# Altium PCB Morpheus_bottom_flex.PcbDoc
Units mm, origin at the board's own origin, x right, y up, seen from the top; angles counter-clockwise.
Board outline 38.7 x 17 mm, 4 copper layers (Top Layer, GND, PWR, Bottom Layer), stack 0.778 mm thick; 45 components, 37 nets, 254 pads, 85 vias.
Unrouted connection lines stored in the file: 76.
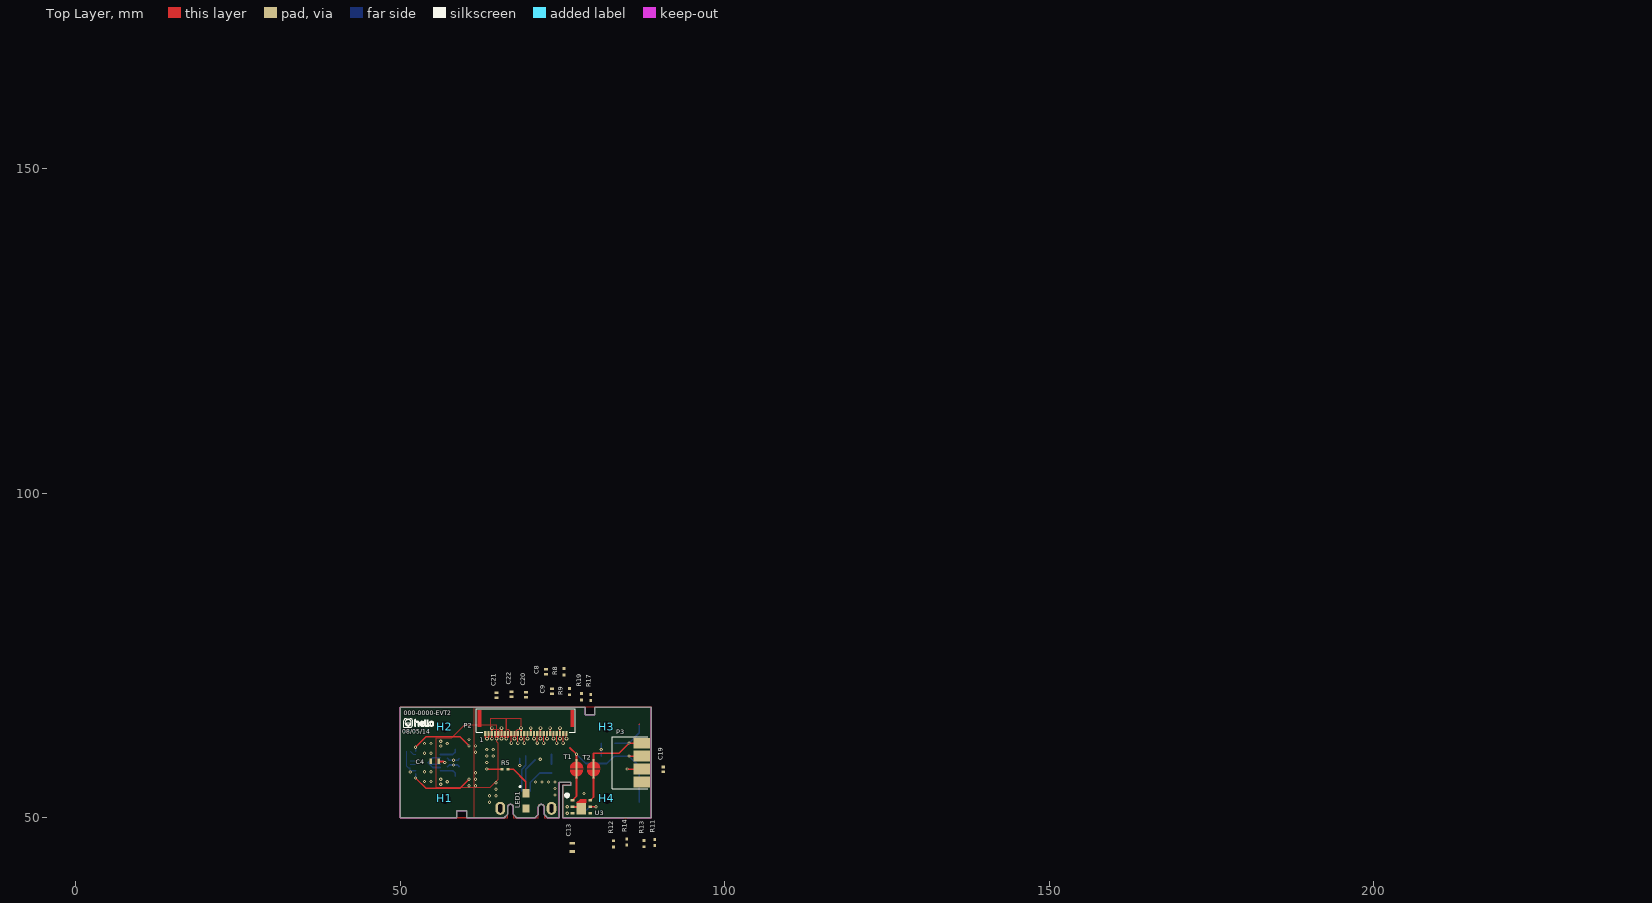
[diagram p0: Top Layer view]
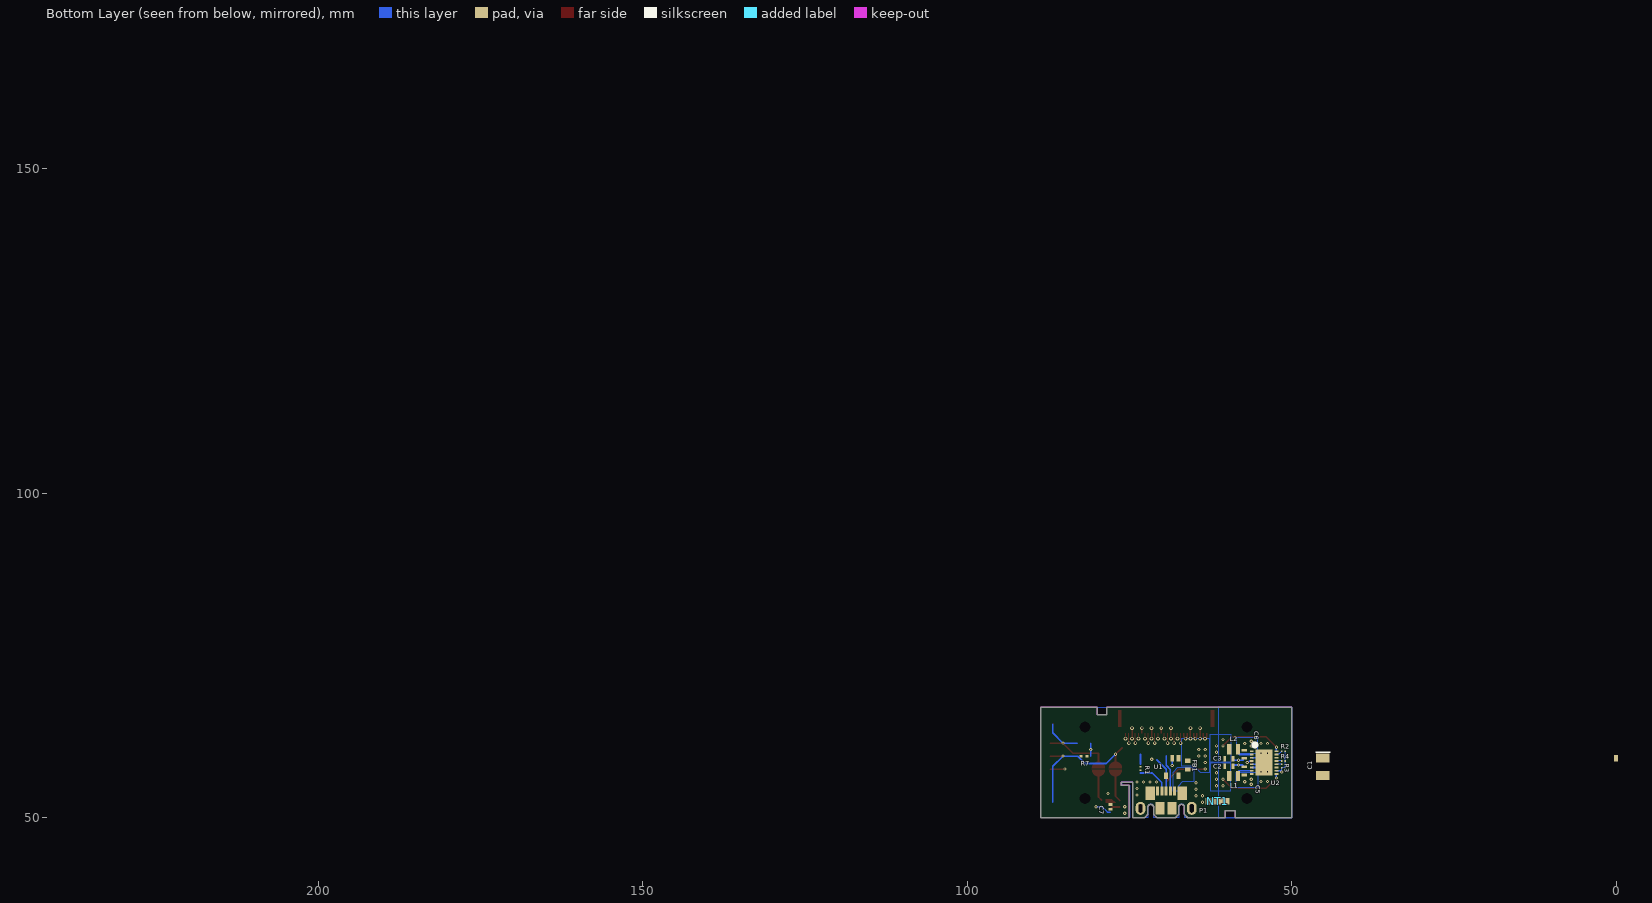
[diagram p1: Bottom Layer view, seen from below]
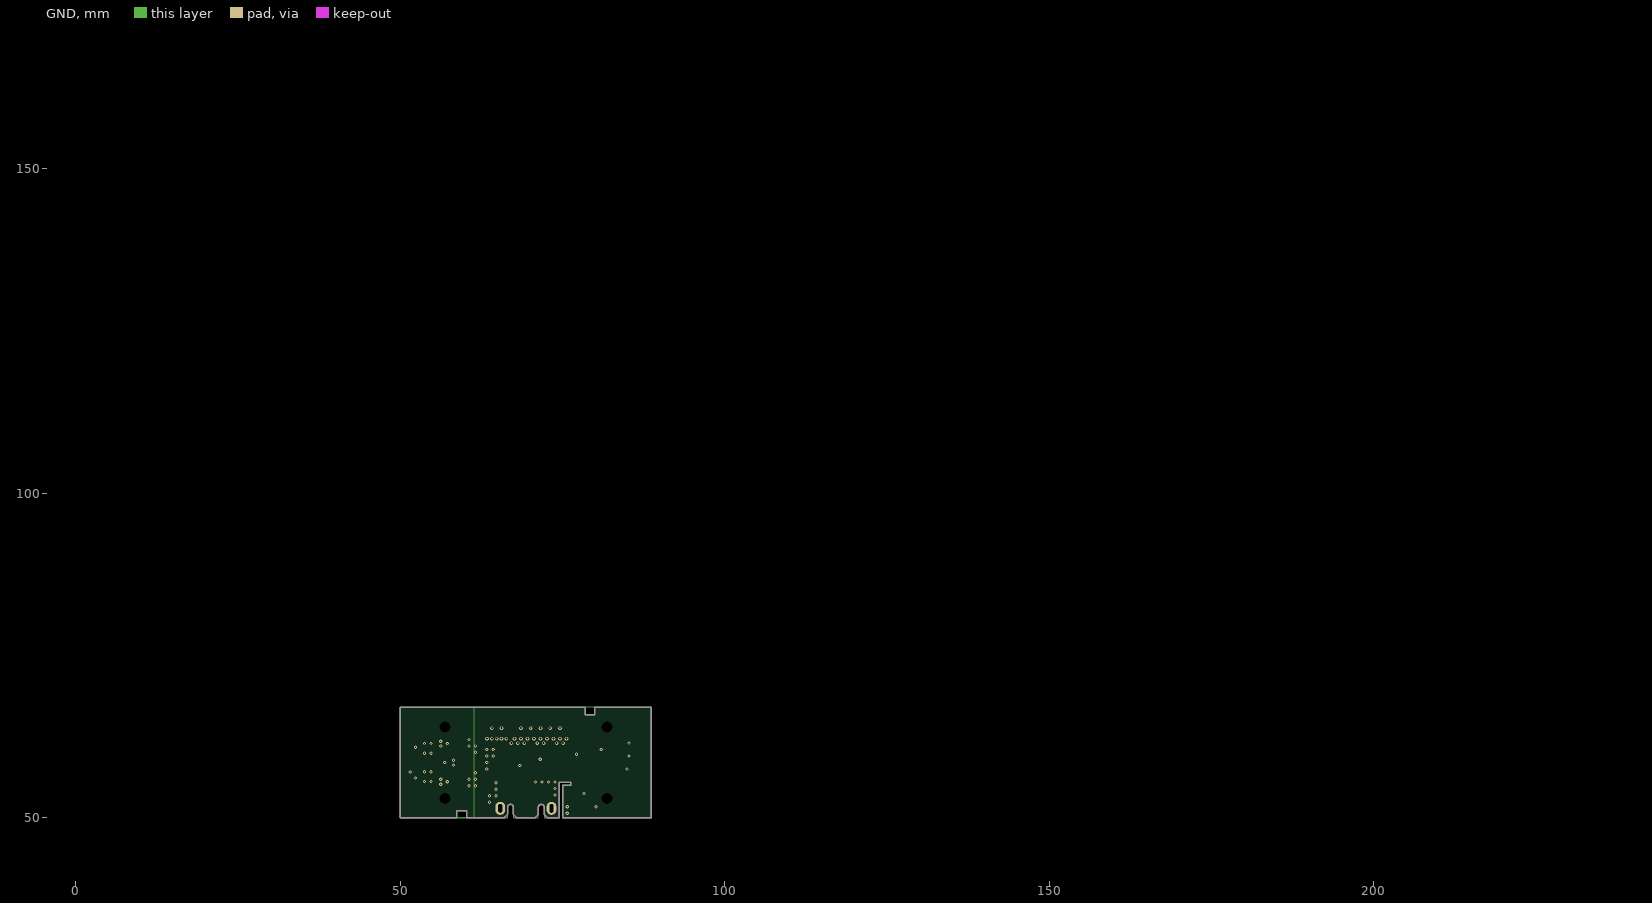
[diagram p2: GND]
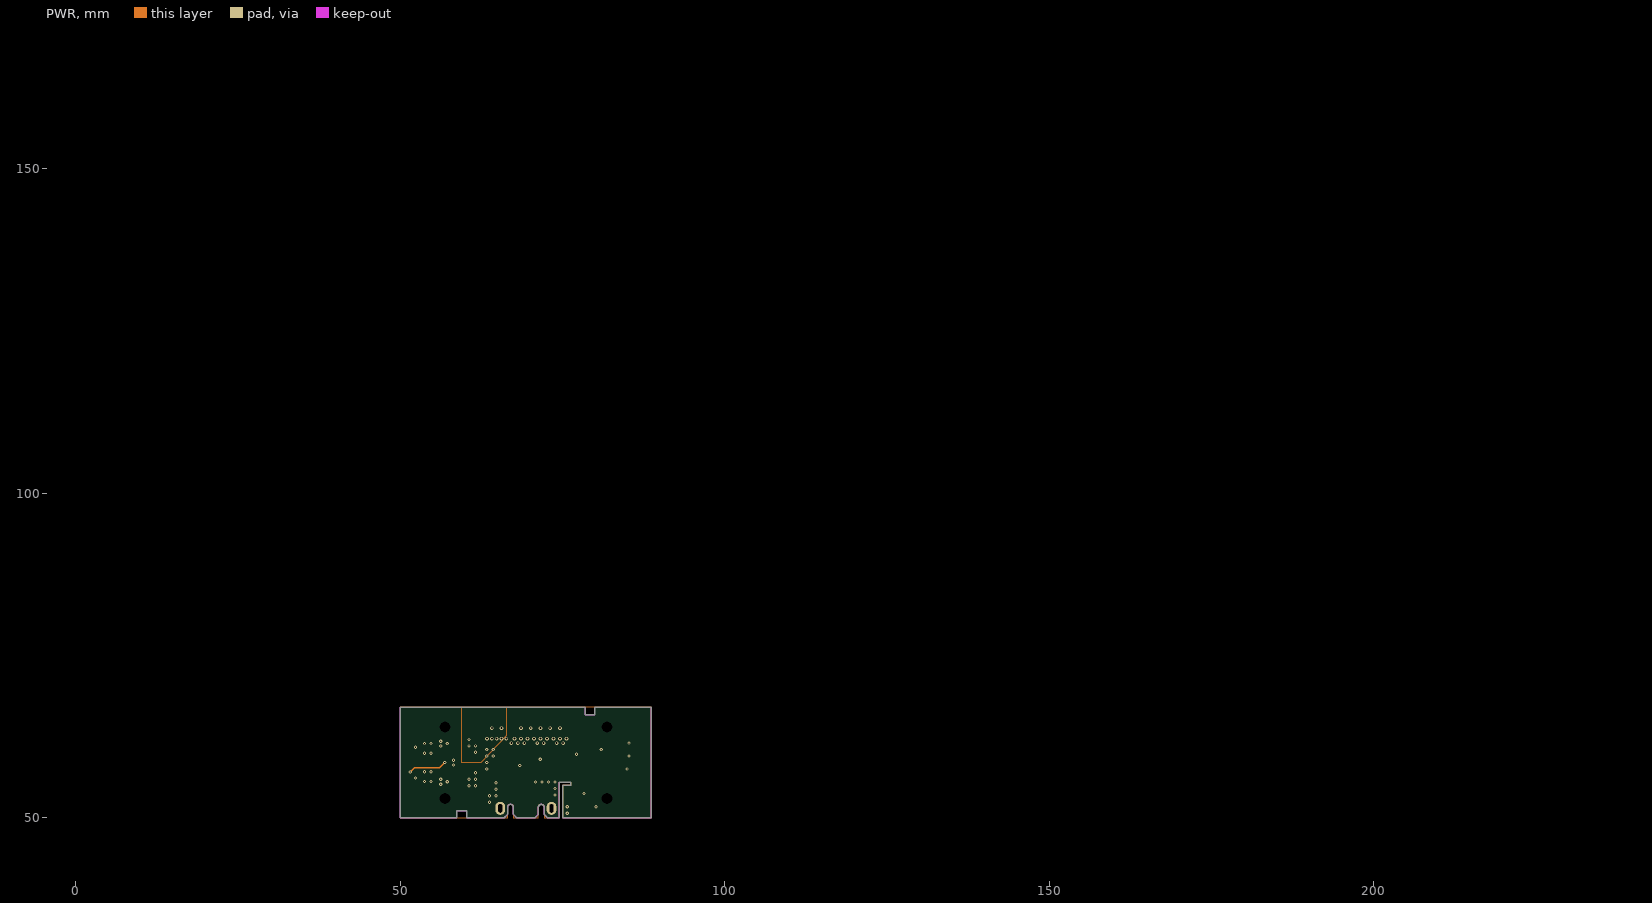
[diagram p3: PWR]

## Layer stack, top to bottom
Top Layer: signal copper 0.0356
Dielectric: core 0.254, FR-4, Dk 4.2
GND: signal copper 0.036
Dielectric: core 0.254, Dk 4.2
PWR: signal copper 0.036
Dielectric: prepreg 0.127, Dk 4.2
Bottom Layer: signal copper 0.0356

## Board outline
60.21,50 60.21,51.1 58.71,51.1 58.71,50 50,50 50,67 78.49,67 78.49,65.9 79.99,65.9 79.99,67 88.7,67 88.7,50 75,50 75,55 76.25,55 76.25,55.5 74.5,55.5 74.5,50 72.675,50 72.175,50.5 72.175,51.6 ccw(c71.725,51.6) 71.725,52.05 ccw(c71.725,51.6) 71.275,51.6 71.275,50.5 70.775,50 67.925,50 67.425,50.5 67.425,51.6 ccw(c66.975,51.6) 66.975,52.05 ccw(c66.975,51.6) 66.525,51.6 66.525,50.5 66.025,50

## Design rules (kind name [scope] priority, off if disabled: settings)
AssemblyTestPointUsage [All] p1: valid=2
AssemblyTestpoint [(IsPad And (OnTopLayer Or OnBottomLayer))] p1: testpointundercomponent=FALSE minsize=0.3 maxsize=2.54 preferedsize=0.6 minholesize=0 maxholesize=1.016 preferedholesize=0 testpointgrid=0.025 usegrid=FALSE gridtolerance=0 allowsidetop=TRUE allowsidebottom=TRUE minspacing=1 compbodyclearance=1 boardedgeclearance=1
Clearance Net_Tie [InComponentClass('Net Tie') vs InComponentClass('Net Tie')] p1: gap=0
Clearance "Hole clearance" [All vs (InPadClass('NPTH'))] p2: gap=0.2
Clearance "Board clearance" [InPolygon vs OnLayer('Keep-Out LAyer')] p3: gap=0.254
Clearance "Polygon to Polygon" [InPolygon vs InPolygon] p4: gap=0.254
Clearance [All] p5: gap=0.14
DiffPairsRouting [All] p1: maxlimit=0.254 minlimit=0.15 mostfreqgap=0.254 toplayer_prefgap=0.15 bottomlayer_prefgap=0.15 maxuncoupledlength=12.7
FabricationTestpoint [(IsPad And (OnTopLayer Or OnBottomLayer)) Or (IsVia) Or (IsPad And OnMultiLayer)] p1: side=3 testpointundercomponent=TRUE minsize=0.3 maxsize=2.54 preferedsize=0.6 minholesize=0 maxholesize=1.016 preferedholesize=0 testpointgrid=0.025 allowsidetop=TRUE allowsidebottom=TRUE usegrid=FALSE gridtolerance=0 minspacing=1 compbodyclearance=1 boardedgeclearance=1
FanoutControl Fanout_Default [All] p5: bgadir=Out bgaviamode=Centered fanoutstyle=Staggered fanoutdirection=Alternating viagrid=0.025 // Fanout_Default (Default Rule)
HoleSize [All] p1 off: absolutevalues=TRUE maxlimit=5 minlimit=0.35 maxpercent=80.000 minpercent=20.000
NetAntennae [NOT InComponent('T1') AND NOT InComponent('T2') AND NOT InComponent('T3') AND NOT InComponent('T3') AND NOT InComponent('T4') AND NOT InComponent('T5') AND NOT InComponent('T6') AND NOT InComponent('T7') AND NOT InComponent('T8')] p1: netantennaetolerance=0
PasteMaskExpansion [All] p1: expansion=-0.05
PolygonConnect "Polygon Connect Net Tie" [(InComponentClass('Net Tie'))] p1: connectstyle=Direct reliefconductorwidth=0.254 reliefentries=4 polygonreliefangle="90 Angle"
PolygonConnect [All] p2: connectstyle=Relief reliefconductorwidth=0.35 reliefentries=4 polygonreliefangle="90 Angle"
RoutingCorners [All] p1: cornerstyle=45-Degree minsetback=1 maxsetback=5
RoutingVias [All] p1: holewidth=0.2 width=0.5 viastyle="Through Hole" minholewidth=0.2 minwidth=0.5 maxholewidth=1 maxwidth=1
ShortCircuit "Schematic Short-Circuit Constraint_5" [HasPad('T1-2')] p1: allowed=TRUE
ShortCircuit "Schematic Short-Circuit Constraint_4" [HasPad('T4-2')] p2: allowed=TRUE
ShortCircuit "Schematic Short-Circuit Constraint_3" [HasPad('T3-2')] p3: allowed=TRUE
ShortCircuit "Schematic Short-Circuit Constraint_1" [HasPad('T3-2')] p4: allowed=TRUE
ShortCircuit "Schematic Short-Circuit Constraint" [HasPad('T4-2')] p5: allowed=TRUE
ShortCircuit "Schematic Short-Circuit Constraint_2" [HasPad('T2-2')] p6: allowed=TRUE
ShortCircuit "Net Tie" [InComponentClass('Net Tie') vs InComponentClass('Net Tie')] p7: allowed=TRUE
ShortCircuit [All] p8: allowed=FALSE
SilkscreenOverComponentPads SilkToSolderMaskClearance [IsPad] p1: minsilkscreentomaskgap=0.254
SolderMaskExpansion [All] p1: expansion=0.07
Width "Power width" [InNetClass('Power')] p1: maxlimit=2 minlimit=0.2 preferedwidth=1
Width LED [InNetClass('LED')] p2: maxlimit=0.15 minlimit=0.15 preferedwidth=0.15
Width TP [InNetClass('TP')] p3: maxlimit=0.15 minlimit=0.15 preferedwidth=0.15
Width [All] p4: maxlimit=2 minlimit=0.15 preferedwidth=0.15
17 further rules are at their usual default settings.

## Classes and differential pairs
pad class NPTH: H1-1 H2-1 H3-1 H4-1
component class Temperature_humidity: C13 T1 T2 U3
component class Power_management: C1 C2 C3 C4 C5 C6 C7 C8 C9 FB1 L1 L2 NT1 P1 R1 R2 R3 R4 R7 R8 R9 U1 U2
component class Morpheus_bottom: C19 C20 C21 C22 H1 H2 H3 H4 LED1 P2 P3 R5 R11 R12 R13 R14 R17 R19

## Components (designator, comment, footprint, x,y, rotation, side; value= is the part's Value field where it differs from the comment)
C1 "220u" Tant_EIA_3528 45.2,57.85 r270 bottom
C2 "10u" CAP0603 59.675,57.9 r0 bottom
C3 "10u" CAP0603 59.675,59.1 r0 bottom
C4 "4.7u" CAP0603 55.3,58.675 r0 top
C5 "4.7u" CAP0603 57.275,57.225 r270 bottom
C6 "4.7u" CAP0603 57.275,59.775 r90 bottom
C7 "1000p" CAP0402 77.95,51.67 r270 bottom
C8 "1800p" CAP0402 72.425,72.5 r90 top
C9 "1800p" CAP0402 73.4,69.475 r90 top
C13 "0.1u" CAP0603 76.518,45.425 r90 top
C19 "2200p" CAP0402 90.525,57.45 r90 top
C20 "2200p" CAP0402 69.375,68.95 r90 top
C21 "2200p" CAP0402 64.85,68.875 r90 top
C22 "2200p" CAP0402 67.15,69.05 r90 top
FB1 "742792641" res0603 66.025,58.1 r90 bottom
H1 "Hole" HOLE_ROUND_1.7mm 56.85,53 r0 top locked
H2 "Hole" HOLE_ROUND_1.7mm 56.85,64 r0 top locked
H3 "Hole" HOLE_ROUND_1.7mm 81.85,64 r0 top locked
H4 "Hole" HOLE_ROUND_1.7mm 81.85,53 r0 top locked
L1 "2.2u" VLS201612Ex-xxxx 58.95,56.425 r270 bottom
L2 "2.2u" VLS201612Ex-xxxx 58.95,60.575 r270 bottom
LED1 "APT2012SGC" LED_Kingbright 69.35,52.6 r90 top locked
NT1 "NT" Net_tie 61.4,52.525 r0 bottom net-tie
P1 "105164-001" molex_105164-001 69.35,52.75 r180 bottom locked
P2 "51281-2694" molex_51281-2694_reverse 69.35,63 r180 top locked
P3 "47420-0001" molex_47420-0001 87.2,55.5 r180 top locked
R1 "100k" RES0201 73.3,57.575 r90 bottom
R2 "100k" RES0201 51.25,60.25 r180 bottom
R3 "100k" RES0201 51.525,57.975 r270 bottom
R4 "100k" RES0201 51.25,58.75 r180 bottom
R5 "475" RES0402 66.15,57.5 r180 top
R7 "10" RES0402 82,59.5 r0 bottom
R8 "10" RES0402 75.225,72.5 r90 top
R9 "10" RES0402 76.075,69.425 r90 top
R11 "10" RES0402 89.2,46.175 r90 top
R12 "10" RES0402 82.856,45.977 r90 top
R13 "10" RES0402 87.55,46 r90 top
R14 "10" RES0402 84.9,46.25 r90 top
R17 "6.81k" RES0402 79.35,68.55 r90 top
R19 "6.81k" RES0402 77.925,68.65 r90 top
T1 "Solderbridge_short_1mm" Solderbridge_short_1mm 77.15,57.525 r90 top locked
T2 "Solderbridge_short_1mm" Solderbridge_short_1mm 79.775,57.525 r90 top locked
U1 "824011" SOT-23-5 68.4,57.825 r0 bottom
U2 "LM3370SD-4221" wson-16 54.25,58.5 r180 bottom
U3 "HTU21D" HTU2xx 77.893,51.677 r180 top

## Footprints (in the part's own frame and the unit in brackets; to place one, negate y for a bottom-side part, rotate by r counter-clockwise, add the part's x,y. Pads: shape width x height; smd on the part's side, far side on the other; paste and mask are expansions set on the pad)
CAP0402 [mm] "Chip Capacitor, 2-Leads, Body 0402 / 0.10x0.50mm, IPC High Density"
  rect 0.4x0.6 smd: 1(-0.375,0) 2(0.375,0)
  body extent -0.53,-0.28 0.53,0.28, height 0.55
CAP0603 [mm] "Chip Capacitor, 2-Leads, Body 0603 / 1.60x0.8mm, IPC High Density"
  rect 0.425x0.85 smd: 1(-0.625,0) 2(0.625,0)
  body extent -0.8,-0.4 0.8,0.4, height 0.8
HOLE_ROUND_1.7mm [mm]
  round 1.2 hole 1.7: 1(0,0)
HTU2xx [mm]
  rect 0.6x0.4 smd paste-0.05: 1(1.375,-0.987) 2(1.375,0.013) 3(1.375,1.013) 4(-1.375,0.988) 5(-1.375,-0.012) 6(-1.375,-1.012)
  rect 1.5x1.8 smd paste-0.05: 7(0,0.275)
  Top Layer region: -0.75,-0.625 -0.75,-1.2 0.175,-1.2 0.75,-0.625
  silkscreen extent 2.1,-1.87 2.3,-1.68, body extent -1.5,-1.5 1.5,1.5, height 0.9
LED_Kingbright [mm]
  rect 1.25x1.1 smd: 1(1.175,0) 2(-1.175,0)
  silkscreen extent 2.1,0.8 2.3,1
molex_47420-0001 [mm] "Molex 4-pin spring connector"
  rect 2.5x1.65 smd: 1(0,0) 2(0,-2) 3(0,-4) 4(0,-6)
  silkscreen extent -0.95,-7 4.52,1, body extent -0.95,-7 4.53,1, height 2.6
molex_51281-2694_reverse [mm] "Molex 26-pin 0.5mm pitch connector with reverse pinout"
  rect 0.35x0.8 smd: 1(6.25,0) 2(5.75,0) 3(5.25,0) 4(4.75,0) 5(4.25,0) 6(3.75,0) 7(3.25,0) 8(2.75,0) 9(2.25,0) 10(1.75,0) 11(1.25,0) 12(0.75,0) 13(0.25,0) 14(-0.25,0) 15(-0.75,0) 16(-1.25,0) 17(-1.75,0) 18(-2.25,0) 19(-2.75,0) 20(-3.25,0) 21(-3.75,0) 22(-4.25,0) 23(-4.75,0) 24(-5.25,0) 25(-5.75,0) 26(-6.25,0)
  Top Layer region: -7.45,-3.6 -6.85,-3.6 -6.85,-1 -7.45,-1
  Top Layer region: 6.85,-3.6 7.45,-3.6 7.45,-1 6.85,-1
  silkscreen extent -7.62,-3.78 7.63,-0.15, body extent -7.55,-3.77 7.55,0.28, height 1.15
molex_105164-001 [mm] "Molex reverse flangless USB receptacle"
  rect 0.45x1.38 smd: 1(1.3,1.35) 2(0.65,1.35) 3(0,1.35) 4(-0.65,1.35) 5(-1.3,1.35)
  rrect100% 1.5x2 hole 0.6 slot 1.3 at 90 deg: 5(-3.95,-1.3) 5(3.95,-1.3)
  rect 1.475x2.1 smd: 5(-2.475,1) 5(2.475,1)
  rect 1.375x1.9 smd: 5(-0.937,-1.275) 5(0.938,-1.275)
  body extent -4.1,-3.45 4.1,1.7, height 2.45
Net_tie [mm] "short circuit to tie 2 nets"
  rect 2x1 smd paste-1 mask+0.102: 1(-0.85,0) 2(0.85,0)
RES0201 [mm] "Chip resistor 0201 high density"
  rect 0.25x0.25 smd: 1(-0.275,0) 2(0.275,0)
  body extent -0.35,-0.13 0.35,0.13, height 0.5
RES0402 [mm] "Chip resistor 0402 high density"
  rect 0.45x0.4 smd: 1(-0.475,0) 2(0.475,0)
  body extent -0.61,-0.2 0.6,0.2, height 0.5
res0603 [mm] "Chip resistor 0603 high density"
  rect 0.65x0.8 smd: 1(-0.675,0) 2(0.675,0)
  body extent -0.85,-0.4 0.84,0.4, height 0.5
Solderbridge_short_1mm [mm] "Solderbridge for debugging"
  rect 1.5x0.3 smd paste-2 mask-2: 1(-0.75,0) 2(0.75,0)
  Top Layer region: -0.134,0.994 -0.567,0.895 -0.915,0.618 -1.108,0.217 -1.108,-0.228 -0.915,-0.629 -0.567,-0.906 -0.134,-1.006 -0.134,-1.006
  Top Layer region: 0.134,0.994 0.567,0.895 0.915,0.618 1.108,0.217 1.108,-0.228 0.915,-0.629 0.567,-0.906 0.134,-1.006 0.134,-1.006
SOT-23-5 [mm] "SOT-23 5 pin, 0.95mm pitch, IPC Medium density"
  rect 0.6x1.05 smd paste-0.1: 1(-0.95,-1.35) 2(0,-1.35) 3(-68.4,-1.35) 4(0.95,1.35) 5(-0.95,1.35)
  body extent -1.53,-0.87 1.53,0.87, height 1.45
Tant_EIA_3528 [mm] "Tantalum Capacitor EIA 3528"
  rect 1.42x2.13 smd: 1(-1.35,0) 2(1.35,0)
  silkscreen extent -2.27,-1.12 -2.27,1.12, body extent -1.59,-1.3 1.54,1.38, height 1.9
VLS201612Ex-xxxx [mm] "TDK SMD shielded power inductor"
  rect 1.6x0.65 smd: 1(0,0.675) 2(0,-0.675)
  body extent -0.8,-1 0.8,1, height 1.45
wson-16 [mm] "WSON, 16 pins, 0.5 pitch, Medium density"
  rect 0.6x0.25 smd: 1(-1.9,1.75) 2(-1.9,1.25) 3(-1.9,0.75) 4(-1.9,0.25) 5(-1.9,-0.25) 6(-1.9,-0.75) 7(-1.9,-1.25) 8(-1.9,-1.75) 9(1.9,-1.75) 10(1.9,-1.25) 11(1.9,-0.75) 12(1.9,-0.25) 13(1.9,0.25) 14(1.9,0.75) 15(1.9,1.25) 16(1.9,1.75)
  rect 2.6x4 smd: 17(0,0)
  silkscreen extent -1.53,2.63 -1.33,2.82, body extent -2,-2.5 2,2.5, height 0.8

## Part data
C1: library part C_220u_20_10_3528_Tant, "Chip capacitor"
C2 C3: library part C_10u_10_6.3_X5R_0603, "Chip capacitor"
C4 C5 C6: library part C_4.7u_20_6.3_X5R_0603, "Chip capacitor"
C7: library part C_1000p_10_50_X7R_0402, "Chip capacitor"
C8 C9: library part C_1800p_10_50_X7R_0402, "Chip capacitor"
C13: library part C_0.1u_10_50_X7R_0603, "Chip capacitor"
C19 C20 C21 C22: library part C_2200p_5_16_STD_0402, "Chip capacitor"
FB1: library part FB_300_2_0.15_0603, "Ferrite bead, 300 ohm impedance"
H1 H2 H3 H4: "general purpose hole"
L1 L2: library part L_2.2u_20_?_0.195_1.05_1.05, "SMD power inductor, 2.2uH"
LED1: "Kingbright Green SMT LED"
NT1: library part "Net tie", "Net tie"
P1: library part molex_105164-001, "Molex right-angle reverse flangeless USB Mini-B OTG receptacle"
P2: library part 51281-011, "Molex 26-pin 0.5mm pitch connector"
P3: library part molex_47420-0001, "Molex 4-pin spring connector 1.8 mm working height"
R1 R2 R3 R4: library part R_100k_5_0.05_0201, "Chip Resistor"
R5: library part R_475_1_0.1_0402, "Chip Resistor"
R7 R8 R9 R11 R12 R13 R14: library part R_10_1_0.1_0402, "Chip Resistor"
R17 R19: library part R_6.81k_1_0.1_0402, "Chip Resistor"
T1 T2: "Solderbridge, shorted"
U1: library part Wuerth-824011, "ESD protection IC for 2 I/O channels and VDD"
U2: "TI PMIC with fixed 3.3 and 1.8 outputs"
U3: "Meas-spec T/H sensor"

## Free pads (board coordinates)
  round 0.64 on Mech16: 1(201.525,157.05) 1(202.35,156.125) 1(202.35,160.875) 1(203.725,155.575) 1(203.725,157.075) 1(203.725,159.925) 1(203.725,161.425) 1(204.725,155.575) 1(204.725,157.075) 1(204.725,159.925) 1(204.725,161.425) 1(206.225,155.175) 1(206.225,155.925) 1(206.225,161.05) 1(206.225,161.8) 1(206.85,158.5) 1(207.225,155.175) 1(207.225,161.8) 1(208.2,158.125) 1(208.2,158.875) 1(210.3,154.925) 1(210.3,155.925) 1(210.3,156.925) 1(210.3,160.075) 1(210.3,161.075) 1(210.3,162.075) 1(211.3,154.925) 1(211.3,155.925) 1(211.3,156.925) 1(211.3,157.925) 1(211.3,159.075) 1(211.3,160.075) 1(211.3,161.075) 1(211.3,162.075) 1(213.325,158.65) 1(213.325,159.65) 1(213.325,160.65) 1(213.325,161.65) 1(218.4,158.05) 1(218.65,167.925) 1(219.65,167.925) 1(220.65,167.925) 1(221.65,167.925) 1(222.525,167.925) 1(223.525,167.925) 1(224.6,167.925) 1(225.6,167.925) 1(229.084,154.475) 1(230.15,151.7) 1(231.734,154.475)
  round 0.2 on Mech16: 1(201.525,157.05) 1(202.35,156.125) 1(202.35,160.875) 1(203.725,155.575) 1(203.725,157.075) 1(203.725,159.925) 1(203.725,161.425) 1(204.725,155.575) 1(204.725,157.075) 1(204.725,159.925) 1(204.725,161.425) 1(206.225,155.175) 1(206.225,155.925) 1(206.225,161.05) 1(206.225,161.8) 1(206.85,158.5) 1(207.225,155.175) 1(207.225,161.8) 1(208.2,158.125) 1(208.2,158.875) 1(210.3,154.925) 1(210.3,155.925) 1(210.3,156.925) 1(210.3,160.075) 1(210.3,161.075) 1(210.3,162.075) 1(211.3,154.925) 1(211.3,155.925) 1(211.3,156.925) 1(211.3,157.925) 1(211.3,159.075) 1(211.3,160.075) 1(211.3,161.075) 1(211.3,162.075) 1(213.325,158.65) 1(213.325,159.65) 1(213.325,160.65) 1(213.325,161.65) 1(218.4,158.05) 1(218.65,167.925) 1(219.65,167.925) 1(220.65,167.925) 1(221.65,167.925) 1(222.525,167.925) 1(223.525,167.925) 1(224.6,167.925) 1(225.6,167.925) 1(229.084,154.475) 1(230.15,151.7) 1(231.734,154.475)
  round 0.84 on Mech16: 1(215.25,151.345) 1(215.25,151.945) 1(223.45,151.345) 1(223.45,151.945)
  round 0.79 on Mech16: 1(216.925,154.525) 1(216.925,154.925) 1(221.775,154.525) 1(221.775,154.925)
  round 2.14 on Mech16: 1(236.825,152.425) 1(236.825,164.425)

## Via types
v1: diameter 0.5, hole 0.2, Top Layer to Bottom Layer, 53 vias
v2: diameter 0.559, hole 0.305, Top Layer to Bottom Layer, 28 vias
v3: diameter 0.5, hole 0.2, Top Layer to Bottom Layer, tented top, 4 vias

## Nets (pads, with @x,y where several pads share a name; then routed paths per layer and width w, separated by ;. In a path a pad name is that pad's centre, name@x,y a point inside that pad or via, vN(x,y) a via of type N, cw(c..) or ccw(c..) an arc to the next point about the centre after c; other vN are vias at no path point)
1.8V: C2.2 C13.2 C22.1 L1.2 P2.7 P2.8 U2.9 U3.5 | length 15.3
  Top Layer w0.2: P2.7 66.1,62.45 v2(66.35,62.2) 66.6,62.45 P2.8
  Top Layer w0.254: v1(52.35,56.125) 53.942,54.533 59.183,54.533 v1(60.575,55.925) ; U3.5 79.279,51.7 v1(80.15,51.7)
  Bottom Layer w0.254: v1(52.35,56.125) U2.9 ; 77.95,50.87 78.394,50.87 79.224,51.7 v1(80.15,51.7)
  other v1: 60.575,54.925 61.575,54.925 61.575,55.925 61.575,56.925
3.3V: C3.2 C21.1 L2.2 P2.4 P2.5 U2.16 | length 11.9
  Top Layer w0.2: P2.4 64.6,62.45 v2(64.85,62.2) 65.1,62.45 P2.5
  Top Layer w0.254: v1(52.35,60.875) 53.942,62.467 59.183,62.467 v1(60.575,61.075)
  Bottom Layer w0.254: U2.16 v1(52.35,60.875)
  other v1: 61.575,60.075 61.575,61.075 60.575,62.075
5V: C1.1 C4.2 C5.2 C6.2 C19.2 C20.1 FB1.2 P2.1 P2.2 P3.2 R1.2 R2.2 R3.2 R4.2 R5.2 U2.1 U2.4 U2.8 | length 18.5
  Top Layer w0.2: P2.1 63.1,62.45 v2(63.35,62.2) 63.6,62.45 P2.2
  Top Layer w0.254: C4.2@56.1,58.675 56.675,58.675 v1(56.85,58.5) ; v1(63.325,57.5) R5.2 ; v1(84.95,57.5) P3.2
  PWR w0.254: v1(51.525,57.05) 52.175,57.7 56.05,57.7 v1(56.85,58.5)
  Bottom Layer w0.15: R2.2 R4.2 50.975,57.925 51.2,57.7 R3.2 v1(51.525,57.05)
  Bottom Layer w0.254: v1(51.525,57.05) 51.55,57.05 51.75,57.25 52.35,57.25 ; U2.4 56.467,58.75 56.717,58.5 v1(56.85,58.5)
  other v1: 56.225,55.175 57.225,55.55 56.225,55.925 63.325,58.5 63.325,59.5 64.325,59.5 63.325,60.5 64.325,60.5 56.225,61.05 57.225,61.425 56.225,61.8
CCU_CLK: P2.11 | length 1.5
  Top Layer w0.15: v2(68.1,61.5) P2.11
CCU_CMD: P2.10 | length 0.8
  Top Layer w0.15: v2(67.6,62.2) P2.10
CCU_DAT: P2.9 | length 1.5
  Top Layer w0.15: v2(67.1,61.5) P2.9
GND: C1.2 C7.1 C8.1 C9.1 C13.1 C19.1 C20.2 C21.2 C22.2 LED1.2 NT1.2 P1.5 P2.3 P2.6 P2.12 P2.15 P2.18 P2.21 P2.24 P3.1 U1.2 U3.2 U3.7 | length 12.2
  Top Layer w0.2: v2(64.1,62.2) P2.3 v2(64.1,63.8) ; v2(65.6,62.2) P2.6 v2(65.6,63.8) ; v2(68.6,62.2) P2.12 v2(68.6,63.8) ; P2.15 v2(70.1,63.8) ; v2(71.6,62.2) P2.18 v2(71.6,63.8) ; P2.21 v2(73.1,63.8) ; v2(74.6,62.2) P2.24 v2(74.6,63.8)
  Top Layer w0.254: U3.2 77.631,51.664 U3.7
  Bottom Layer w0.254: v1(68.4,58.05) U1.2
  other v1: 75.725,50.675 75.725,51.675 63.75,52.4 63.75,53.4 64.75,53.4 73.825,53.5 78.306,53.732 64.75,54.4 73.825,54.5 64.75,55.4 70.825,55.5 71.825,55.5 72.825,55.5 73.825,55.5 71.55,59
HTU21_SCL: T2.1 U3.6 | length 4.3
  Top Layer w0.25: U3.6 79.775,53.196 T2.1
HTU21_SDA: T1.1 U3.1 | length 4.4
  Top Layer w0.254: U3.1 77.15,53.296 T1.1
I2C_SCL: P2.20 R12.1 T2.2 | length 0.8
  Top Layer w0.15: v2(72.6,62.2) P2.20
I2C_SDA: P2.19 R11.1 T1.2 | length 23.3
  Top Layer w0.15: v2(72.1,61.5) P2.19
  Top Layer w0.254: 76.125,60.8 v1(77.15,59.775) T1.2 ; v1(85.25,59.5) 87.2,59.5
  Bottom Layer w0.254: v1(77.15,59.775) 78.575,58.35 81.8,58.35 82.95,59.5 83.05,59.5 v1(85.25,59.5) 86.825,57.925 86.825,52.425
JTAG_TCK: P2.23 | length 1.5
  Top Layer w0.15: v2(74.1,61.5) P2.23
JTAG_TDI: P2.26 R14.1 | length 0.8
  Top Layer w0.15: v2(75.6,62.2) P2.26
JTAG_TDO: P2.25 R13.1 | length 1.5
  Top Layer w0.15: v2(75.1,61.5) P2.25
JTAG_TMS: P2.22 | length 0.8
  Top Layer w0.15: v2(73.6,62.2) P2.22
LED_DIN: P3.4 R12.2 R14.2
LED_DOUT: P3.3 R11.2 R13.2
NetL1_1: L1.1 U2.7 | length 2.9
  Bottom Layer w0.254: U2.7 58.1,57.25 58.45,56.9 L1.1@58.45,56.425
NetL2_1: L2.1 U2.2 | length 2.9
  Bottom Layer w0.254: U2.2 58.1,59.75 58.45,60.1 L2.1@58.45,60.575
NetLED1_1: LED1.1 R5.1 | length 5.3
  Top Layer w0.254: R5.1 67.4,57.5 69.35,55.55 LED1.1
NetP1_2: P1.2 R7.2
NetP1_3: P1.3 R8.2
NetP1_4: P1.4 R9.2 | length 5.2
  Bottom Layer w0.254: P1.4 70,55.42 71.48,56.9 73.3,56.9
PGND: C2.1 C3.1 C4.1 C5.1 C6.1 NT1.1 U2.3 U2.5 U2.6 U2.17 | length 10
  Bottom Layer w0.254: U2.6 55,57.75 U2.17@54.5,58.25 ; U2.5 U2.17@54.5,58.25 ; U2.3 55,59.25 U2.17 U2.17@54.5,58.25 ; C5.1 57.55,58.125 v1(58.2,58.125) 58.825,58.125 C2.1 ; C6.1 57.55,58.875 v1(58.2,58.875) 58.825,58.875 C3.1
  other v1: 53.725,55.575 54.725,55.575 53.725,61.425 54.725,61.425
  other v3: 53.725,57.075 54.725,57.075 53.725,59.925 54.725,59.925
PMIC_EN_1V8: R1.1 U2.14
PMIC_EN_3V3: R2.1 U2.15 | length 1
  Bottom Layer w0.15: R2.1 51.975,59.8 52.3,59.8 U2.15
PMIC_POR_1V8: R3.1 U2.12 | length 0.8
  Bottom Layer w0.15: R3.1 U2.12
PMIC_POR_3V3: R4.1 U2.13 | length 0.8
  Bottom Layer w0.15: R4.1 U2.13
PMIC_SCL: U2.11
PMIC_SDA: U2.10
SOP0: P2.17 R17.2 | length 1.5
  Top Layer w0.15: v2(71.1,61.5) P2.17
SOP2: P2.16 R19.2 | length 0.8
  Top Layer w0.15: v2(70.6,62.2) P2.16
SWD_EN: R17.1
USB_DM: C7.2 P2.13 R7.1 U1.3 | length 3.5
  Top Layer w0.15: v2(69.1,61.5) P2.13
  Bottom Layer w0.254: 80.95,59.5 80.95,61.5
  other v1: 80.95,60.5
USB_DP: C8.2 P2.14 R8.1 U1.4 | length 0.8
  Top Layer w0.15: v2(69.6,62.2) P2.14
USB_ID: C9.2 R9.1 R19.1 | length 1.5
  Bottom Layer w0.254: 73.3,58.25 73.3,59.75
VSYS: FB1.1 P1.1 U1.5
pads on no net: H1.1 H2.1 H3.1 H4.1 U1.1 U3.3 U3.4
copper on no net: | length 26.9
  Top Layer w0.15: 86.75,64.5 86.825,64.425
  Top Layer w0.254: 79.775,58.35 79.775,59.95 83.7,59.95 v1(85.25,61.5) 87.2,61.5
  Bottom Layer w0.254: 68.7,54.1 68.7,57.425 69.35,58.075 69.35,59.175 69.35,59.508 ; 69.35,54.1 69.35,56.475 ; 69.35,56.25 69.35,56.475 ; 70.798,58.919 69.35,57.471 69.35,56.475 ; 83.05,61.5 v1(85.25,61.5) 86.825,63.075 86.825,64.425

## Polygon pours and split planes (outlines as drawn)
5V on Bottom Layer "5V" (solid, remove dead copper, shelved, pour order 44): 55.225,59.975 55.225,62.361 58.575,62.361 58.575,59.975
5V on Bottom Layer "5V" (solid, remove dead copper, shelved, pour order 43): 55.225,57.025 55.225,54.639 58.575,54.639 58.575,57.025
VSYS on Bottom Layer "VSYS" (solid, remove dead copper, shelved, pour order 46): 68.275,54.1 68.275,57 67.525,57.75 65.1,57.75 65.1,55.525 66.85,55.525 67.5,54.875 67.5,54.1
PGND on Bottom Layer "PGND" (solid, remove dead copper, shelved, pour order 49): 50,67 61.35,67 61.35,50 50,50
1.8V on Bottom Layer "PMIC_OUT1" (solid, remove dead copper, shelved, pour order 48): 59.425,58.425 62.55,58.425 62.55,54.16 59.425,54.16
GND on Bottom Layer "Bottom GND" (solid, shelved, pour order 60): 49.975,49.995 66.5,49.995 66.5,51.637 66.5,51.645 cw(c66.955,51.65) 66.95,52.104 cw(c66.946,51.65) 67.4,51.645 67.4,49.995 71.25,49.995 71.25,51.637 71.25,51.645 cw(c71.705,51.65) 71.7,52.104 cw(c71.696,51.65) 72.15,51.645 72.15,49.995 74.475,49.995 74.475,55.495 76.225,55.495 76.225,54.995 74.975,54.995 74.975,49.995 88.675,49.995 88.675,66.995 49.975,66.995
5V on Bottom Layer "Bottom 5V" (solid, remove dead copper, shelved, pour order 45): 66.95,62.25 62.725,62.25 62.725,56.95 64,56.95 65,57.95 66.95,57.95
3.3V on Bottom Layer "PMIC_OUT2" (solid, remove dead copper, shelved, pour order 47): 59.425,58.575 62.55,58.575 62.55,62.84 59.425,62.84
5V on Top Layer "Top 5V" (solid, remove dead copper, shelved, pour order 57): 64.75,64.3 64.75,61.825 65.05,61.525 65.05,55.875 63.8,54.625 55.55,54.625 55.55,62.325 57.925,62.325 59.9,64.3
PGND on Top Layer "PGND" (solid, remove dead copper, shelved, pour order 58): 50,67 61.35,67 61.35,50 50,50
GND on Top Layer "Top GND" (solid, shelved, pour order 59): 50,50 66.525,50 66.525,51.641 66.525,51.65 cw(c66.979,51.654) 66.975,52.109 cw(c66.971,51.654) 67.425,51.65 67.425,50 71.275,50 71.275,51.641 71.275,51.65 cw(c71.729,51.654) 71.725,52.109 cw(c71.721,51.654) 72.175,51.65 72.175,50 74.5,50 74.5,55.5 76.25,55.5 76.25,55 75,55 75,50 88.7,50 88.7,67 50,67
3.3V on Top Layer "Top 3.3V" (solid, remove dead copper, shelved, pour order 55): 65.35,62.6 66.35,62.6 66.35,65.25 63.85,65.25 63.85,63.65 65.1,63.65 65.35,63.4
1.8V on Top Layer "Top 1.8V" (solid, remove dead copper, shelved, pour order 56): 66.85,62.6 67.85,62.6 67.85,63.4 68.1,63.65 68.6,63.65 68.6,65.25 66.35,65.25 66.35,63.65 66.6,63.65 66.85,63.4
PGND on GND "PGND" (solid, remove dead copper, shelved, pour order 51): 50,67 61.35,67 61.35,50 50,50
GND on GND "GND" (solid, shelved, pour order 52): 50,50 66.525,50 66.525,51.641 66.525,51.65 cw(c66.979,51.654) 66.975,52.109 cw(c66.971,51.654) 67.425,51.65 67.425,50 71.275,50 71.275,51.641 71.275,51.65 cw(c71.729,51.654) 71.725,52.109 cw(c71.721,51.654) 72.175,51.65 72.175,50 74.5,50 74.5,55.5 76.25,55.5 76.25,55 75,55 75,50 88.7,50 88.7,67 50,67
1.8V on PWR "1.8V" (solid, shelved, pour order 54): 50,50 66.525,50 66.525,51.641 66.525,51.65 cw(c66.979,51.654) 66.975,52.109 cw(c66.971,51.654) 67.425,51.65 67.425,50 71.275,50 71.275,51.641 71.275,51.65 cw(c71.729,51.654) 71.725,52.109 cw(c71.721,51.654) 72.175,51.65 72.175,50 74.5,50 74.5,55.5 76.25,55.5 76.25,55 75,55 75,50 88.7,50 88.7,67 50,67
3.3V on PWR "PMIC_OUT2" (solid, remove dead copper, shelved, pour order 53): 59.425,58.575 62.442,58.575 66.4,62.675 66.4,66.95 59.425,66.95

## Keep-outs
Keep-Out Layer:
  the board outline again, w0.15
Mechanical 1:
  lines w0.15: 74.5,50 74.5,55.5 76.25,55.5 76.25,55 75,55 75,50
Drill Drawing:
  lines w0.15: 74.5,50 74.5,55.5 76.25,55.5 76.25,55 75,55 75,50

## Silkscreen, mask and mechanical layers (free items; w line width, h text height)
Top Overlay:
  drawing of 419 lines, arcs and shapes, not listed
  text "000-0000-EVT2" at 50.55,65.775 h0.7
  text "08/05/14" at 50.275,62.925 h0.7
Mechanical 1:
  lines w0.15: 74.5,50 72.675,50 72.175,50.5 72.175,51.6 ccw(c71.725,51.6) 71.725,52.05 ccw(c71.725,51.6) 71.275,51.6 71.275,50.5 70.775,50 67.925,50 67.425,50.5 67.425,51.6 ccw(c66.975,51.6) 66.975,52.05 ccw(c66.975,51.6) 66.525,51.6 66.525,50.5 66.025,50 60.21,50 60.21,51.1 58.71,51.1 58.71,50 50,50 50,67 78.49,67 78.49,65.9 79.99,65.9 79.99,67 88.7,67 88.7,50 75,50
Drill Drawing:
  drawing of 509 lines, arcs and shapes, not listed
  text "Fabrication / Assembly Notes" at 50.875,191.8 h1.52
  text "1. Material: Rigid" at 50.875,188.8 h1.52
  text "2. Number of electrical layers: 4" at 50.875,185.8 h1.52
  text "3. Trace / Space minimum: 5mil (all layers)" at 50.875,182.8 h1.52
  text "4. Thickness: 1.25mm (finished)" at 50.875,179.8 h1.52
  text "5. Finish:  ENIG plating on exposed copper" at 50.875,176.8 h1.52
  text "6. Soldermask: per IPC-SM-840, color green registration within +/- 50um of circuit layer" at 50.875,173.8 h1.52
  text "7. Silkscreen: do print silkscreen on top and bottom layers" at 50.875,170.8 h1.52
  text "8. RoHS: parts shall be RoHS compliant as per European Union directive 2002/95/EC" at 50.875,167.8 h1.52
  text "9. Board must be lead free process compatible and able to withstand minimum of" at 50.875,164.8 h1.52
  text "5 cycles at 250 degrees celsius" at 55.375,161.8 h1.52
  text "10. All Test/QA/QC markings to be made on back side of PCB" at 50.875,158.8 h1.52
  text "Layer" at 51.537,153.382 h1.52
  text "Name" at 61.949,153.382 h1.52
  text "Material" at 85.565,153.382 h1.52
  text "Thickness" at 107.403,153.382 h1.52
  text "Constant" at 123.908,153.382 h1.52
  text "Board Layer Stack" at 138.383,153.382 h1.52
  text "1" at 51.537,150.334 h1.52
  text "Top Paste" at 61.949,150.334 h1.52
  text "2" at 51.537,147.286 h1.52
  text "Top Overlay" at 61.949,147.286 h1.52
  text "3" at 51.537,144.238 h1.52
  text "Top Solder" at 61.949,144.238 h1.52
  text "Solder Resist" at 85.565,144.238 h1.52
  text "0.010mm" at 107.403,144.238 h1.52
  text "3.5" at 123.908,144.238 h1.52
  text "4" at 51.537,141.19 h1.52
  text "Top Layer" at 61.949,141.19 h1.52
  text "Copper" at 85.565,141.19 h1.52
  text "0.036mm" at 107.403,141.19 h1.52
  text "5" at 51.537,138.142 h1.52
  text "Dielectric 1" at 61.949,138.142 h1.52
  text "FR-4" at 85.565,138.142 h1.52
  text "0.254mm" at 107.403,138.142 h1.52
  text "4.2" at 123.908,138.142 h1.52
  text "6" at 51.537,135.094 h1.52
  text "5V" at 61.949,135.094 h1.52
  text "Copper" at 85.565,135.094 h1.52
  text "0.036mm" at 107.403,135.094 h1.52
  text "7" at 51.537,132.046 h1.52
  text "Dielectric 5" at 61.949,132.046 h1.52
  text "0.127mm" at 107.403,132.046 h1.52
  text "4.2" at 123.908,132.046 h1.52
  text "8" at 51.537,128.998 h1.52
  text "3.3V" at 61.949,128.998 h1.52
  text "Copper" at 85.565,128.998 h1.52
  text "0.036mm" at 107.403,128.998 h1.52
  text "9" at 51.537,125.95 h1.52
  text "Dielectric 4" at 61.949,125.95 h1.52
  text "0.254mm" at 107.403,125.95 h1.52
  text "4.2" at 123.908,125.95 h1.52
  text "10" at 51.537,122.902 h1.52
  text "1.8V" at 61.949,122.902 h1.52
  text "Copper" at 85.565,122.902 h1.52
  text "0.036mm" at 107.403,122.902 h1.52
  text "11" at 51.537,119.854 h1.52
  text "Dielectric 3" at 61.949,119.854 h1.52
  text "0.127mm" at 107.403,119.854 h1.52
  text "4.2" at 123.908,119.854 h1.52
  text "12" at 51.537,116.806 h1.52
  text "GND" at 61.949,116.806 h1.52
  text "Copper" at 85.565,116.806 h1.52
  text "0.036mm" at 107.403,116.806 h1.52
  text "13" at 51.537,113.758 h1.52
  text "Dielectric 2" at 61.949,113.758 h1.52
  text "0.254mm" at 107.403,113.758 h1.52
  text "4.2" at 123.908,113.758 h1.52
  text "14" at 51.537,110.71 h1.52
  text "Bottom Layer" at 61.949,110.71 h1.52
  text "Copper" at 85.565,110.71 h1.52
  text "0.036mm" at 107.403,110.71 h1.52
  text "15" at 51.537,107.662 h1.52
  text "Bottom Solder" at 61.949,107.662 h1.52
  text "Solder Resist" at 85.565,107.662 h1.52
  text "0.010mm" at 107.403,107.662 h1.52
  text "3.5" at 123.908,107.662 h1.52
  text "16" at 51.537,104.614 h1.52
  text "Bottom Overlay" at 61.949,104.614 h1.52
  text "17" at 51.537,101.566 h1.52
  text "Bottom Paste" at 61.949,101.566 h1.52
  text "Symbol" at 52.301,95.085 h1.83
  text "Hit Count" at 65.151,95.085 h1.83
  text "Finished Hole Size" at 82.875,95.085 h1.83
  text "Plated" at 117.053,95.085 h1.83
  text "Hole Type" at 129.903,95.085 h1.83
  text "Physical Length" at 148.541,95.085 h1.83
  text "Rout Path Length" at 177.54,95.085 h1.83
  text "2" at 65.151,91.275 h1.52
  text "0.600mm (23.62mil)" at 82.875,91.275 h1.52
  text "PTH" at 117.053,91.275 h1.52
  text "Slot" at 129.903,91.275 h1.52
  text "1.300mm (51.18mil)" at 148.541,91.275 h1.52
  text "0.700mm (27.56mil)" at 177.54,91.275 h1.52
  text "6" at 65.151,87.465 h1.52
  text "1.700mm (66.93mil)" at 82.875,87.465 h1.52
  text "PTH" at 117.053,87.465 h1.52
  text "Round" at 129.903,87.465 h1.52
  text "76" at 65.151,83.655 h1.52
  text "0.200mm (7.87mil)" at 82.875,83.655 h1.52
  text "PTH" at 117.053,83.655 h1.52
  text "Round" at 129.903,83.655 h1.52
  text "84 Total" at 65.151,79.845 h1.52
Mechanical 17:
  drawing of 77 lines, arcs and shapes, not listed
Mechanical 18:
  lines w0.325: 216.6,154.525 ccw(c216.925,154.525) 217.25,154.525 217.25,154.925 ccw(c216.925,154.925) 216.6,154.925 216.6,154.525 ; 216.763,154.725 ccw(c216.925,154.725) 217.088,154.725 ccw(c216.925,154.725) 216.763,154.725 ; 221.45,154.525 ccw(c221.775,154.525) 222.1,154.525 222.1,154.925 ccw(c221.775,154.925) 221.45,154.925 221.45,154.525 ; 221.613,154.725 ccw(c221.775,154.725) 221.938,154.725 ccw(c221.775,154.725) 221.613,154.725
  lines w0.35: 214.9,151.345 ccw(c215.25,151.345) 215.6,151.345 215.6,151.945 ccw(c215.25,151.945) 214.9,151.945 214.9,151.345 ; 223.1,151.345 ccw(c223.45,151.345) 223.8,151.345 223.8,151.945 ccw(c223.45,151.945) 223.1,151.945 223.1,151.345

## Dimensions
50,67 to 88.7,67 on Drill Drawing
88.7,67 to 88.7,50 on Drill Drawing

## Text inside footprints (layer, text, board x,y; h text height)
P2: Top Overlay "1" at 62.275,61.644 h0.7